# Altium PCB PCB1.PcbDoc
Units mil, origin at the board's own origin, x right, y up, seen from the top; angles counter-clockwise.
Board outline 2435 x 3030 mil, 2 copper layers (Top Layer, Bottom Layer); 22 components, 13 nets, 90 pads, 0 vias.
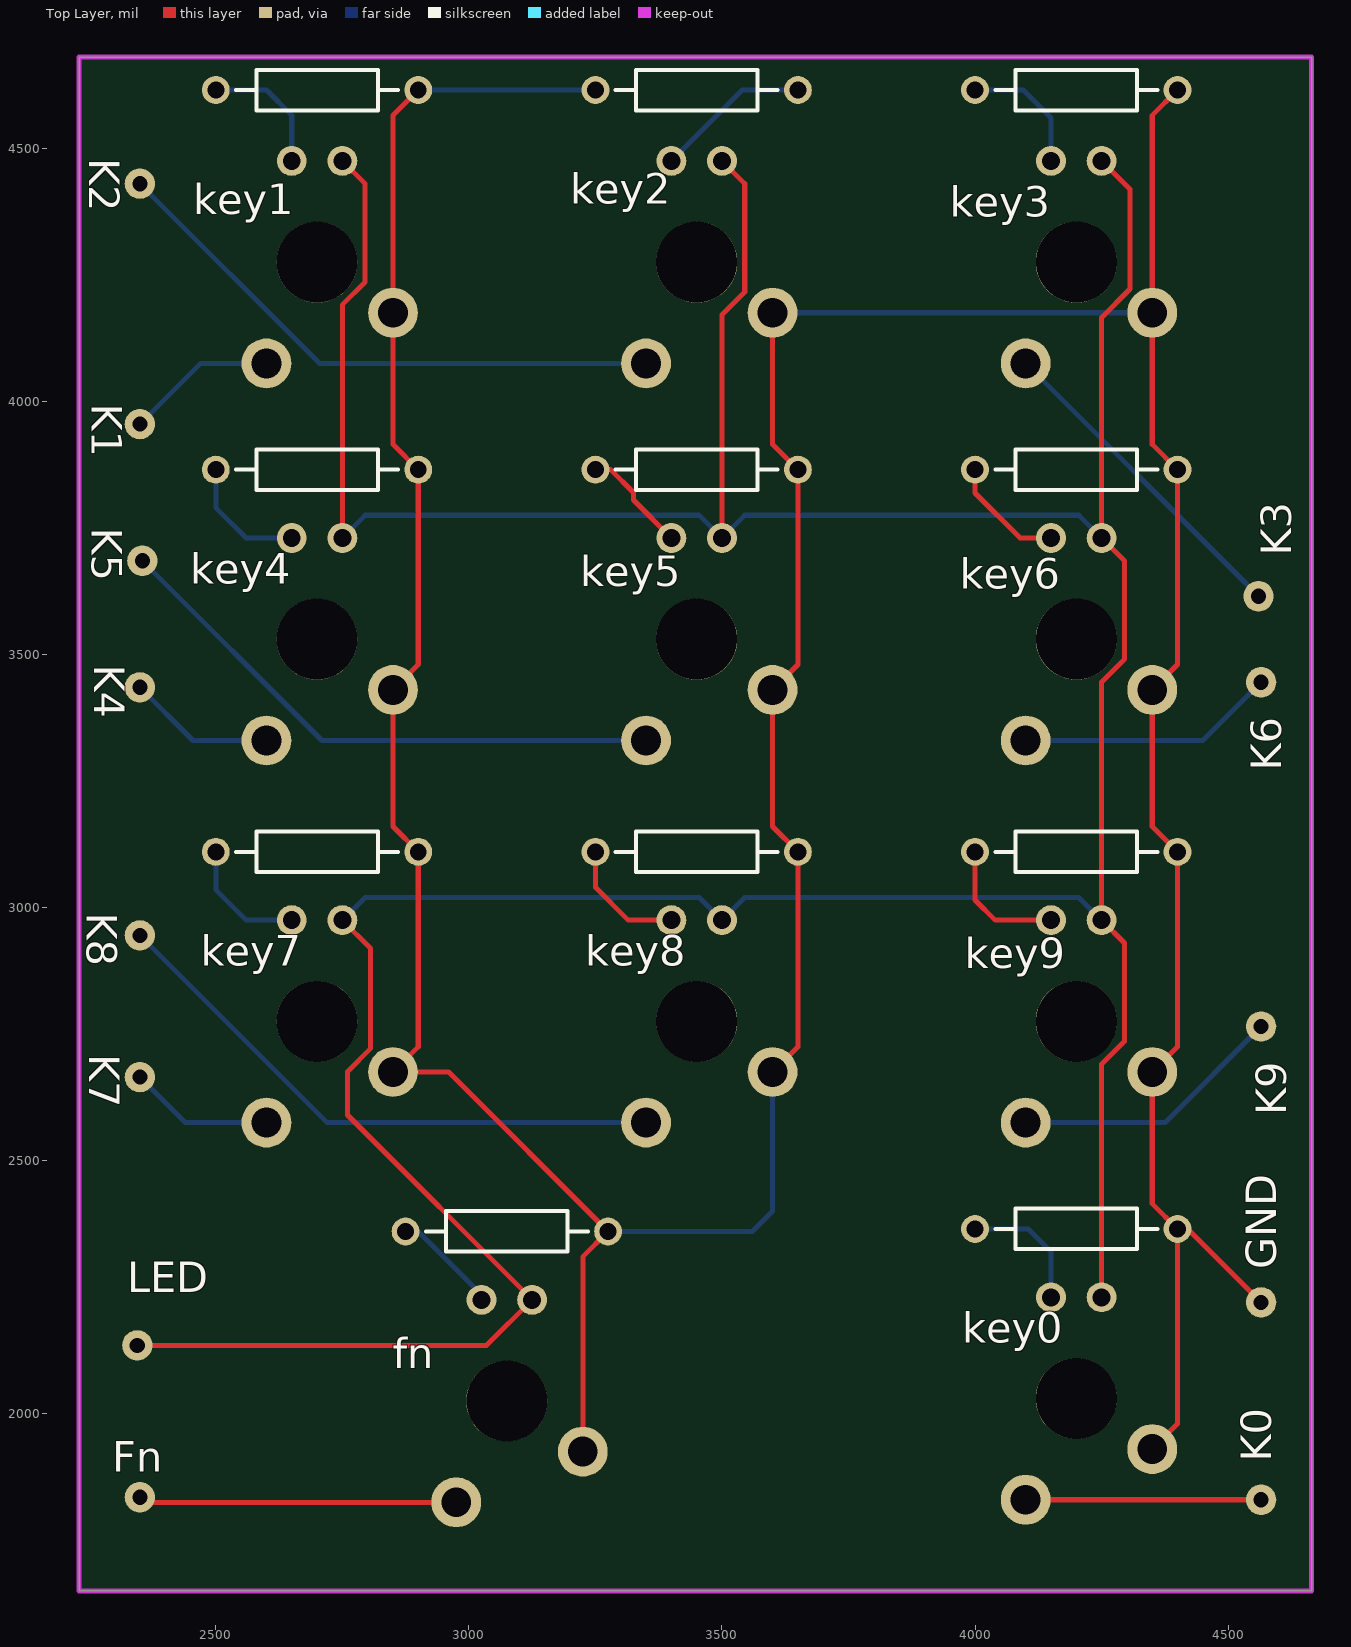
[diagram p0: Top Layer view]
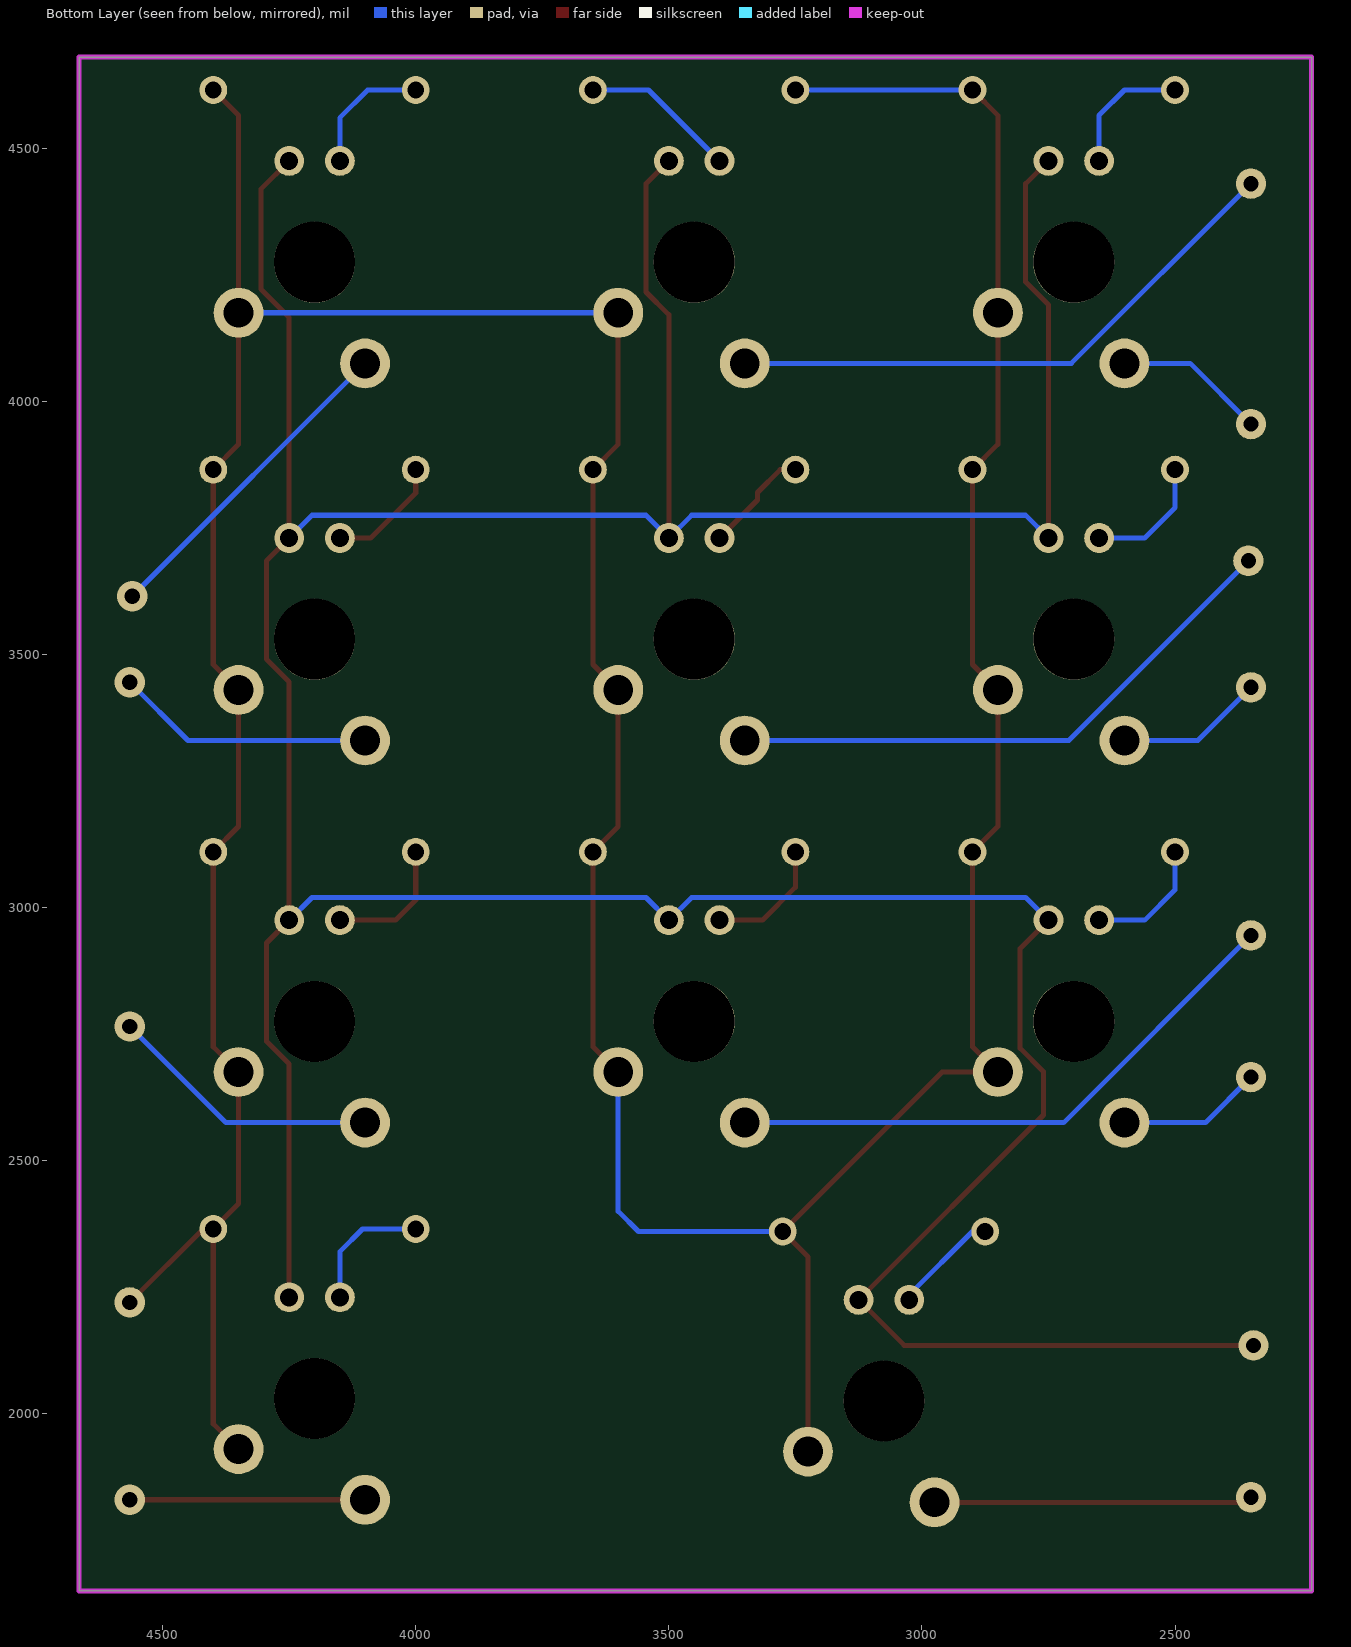
[diagram p1: Bottom Layer view, seen from below]

## Layer stack, top to bottom
Top Solder: solder mask 0.4, Solder Resist, Dk 3.5
Top Layer: signal copper 1.4
Dielectric 1: dielectric 12.6, FR-4, Dk 4.8
Bottom Layer: signal copper 1.4
Bottom Solder: solder mask 0.4, Solder Resist, Dk 3.5

## Board outline
2230,1650 4665,1650 4665,4680 2230,4680

## Design rules (kind name [scope] priority, off if disabled: settings)
Clearance [All] p1: gap=10
PolygonConnect [All] p1: connectstyle=Relief reliefconductorwidth=10 reliefentries=4 polygonreliefangle="90 Angle" airgapwidth=10
RoutingVias [All] p1: holewidth=28 width=50 viastyle="Through Hole" minholewidth=28 minwidth=50 maxholewidth=28 maxwidth=50
SolderMaskExpansion [All] p1: expansion=4
Width [All] p1: maxlimit=10 minlimit=10 preferedwidth=10
30 further rules are at their usual default settings.

## Classes and differential pairs
component class way2: fn key1 key2 key3 key4 key5 key6 key7 key8 key9

## Components (designator, comment, footprint, x,y, rotation, side; value= is the part's Value field where it differs from the comment)
fn "MX_SW" MX_SW-2 3075,2025 r0 top
key0 "MX_SW" MX_SW-2 4200,2030 r0 top (schematic designator key10)
key1 "MX_SW" MX_SW-2 2700,4275 r0 top
key2 "MX_SW" MX_SW-2 3450,4275 r0 top
key3 "MX_SW" MX_SW-2 4200,4275 r0 top
key4 "MX_SW" MX_SW-2 2700,3530 r0 top
key5 "MX_SW" MX_SW-2 3450,3530 r0 top
key6 "MX_SW" MX_SW-2 4200,3530 r0 top
key7 "MX_SW" MX_SW-2 2700,2775 r0 top
key8 "MX_SW" MX_SW-2 3450,2775 r0 top
key9 "MX_SW" MX_SW-2 4200,2775 r0 top
R1 "Res2" AXIAL-0.4 2700,4615 r0 top
R2 "Res2" AXIAL-0.4 3450,4615 r180 top
R3 "Res2" AXIAL-0.4 4200,4615 r180 top
R4 "Res2" AXIAL-0.4 2700,3865 r180 top
R5 "Res2" AXIAL-0.4 3450,3865 r180 top
R6 "Res2" AXIAL-0.4 4200,3865 r180 top
R7 "Res2" AXIAL-0.4 2700,3110 r180 top
R8 "Res2" AXIAL-0.4 3450,3110 r180 top
R9 "Res2" AXIAL-0.4 4200,3110 r180 top
R10 "Res2" AXIAL-0.4 3075,2360 r180 top
R11 "Res2" AXIAL-0.4 4200,2365 r180 top

## Footprints (in the part's own frame and the unit in brackets; to place one, negate y for a bottom-side part, rotate by r counter-clockwise, add the part's x,y. Pads: shape width x height; smd on the part's side, far side on the other; paste and mask are expansions set on the pad)
AXIAL-0.4 [mm] "Axial Device, Thru-Hole; 2 Leads; 0.4 in Pin Spacing"
  round 1.4 hole 0.85: 1(-5.08,0) 2(5.08,0)
  silkscreen extent -4.06,-1.02 4.06,1.02
MX_SW-2 [mm] "without Fixation pins  1-Pole w/LED"
  round 2.5 hole 1.5: 1(3.81,-2.54) 2(-2.54,-5.08)
  round 1.5 hole 0.9: 3(1.27,5.08) 4(-1.27,5.08)
  round 4.064 hole 4.064: ""(0,0)

## Part data
fn key0 key1 key2 key3 key4 key5 key6 key7 key8 key9: library part MX_SW-2, "without Fixation pins  1-Pole w/LED"
R1 R2 R3 R4 R5 R6 R7 R8 R9 R10 R11: "Resistor"

## Free pads (board coordinates)
  round 60 hole 30: 32(2350,1835) 39(2350,2665) 40(2350,2945) 41(2350,3435) 42(2355,3685) 43(2350,3955) 44(2350,4430) 45(4565,2765) 46(4565,3445) 47(4560,3615) 48(4565,1830) 49(4565,2220) 50(2345,2135)

## Nets (pads, with @x,y where several pads share a name; then routed paths per layer and width w, separated by ;. In a path a pad name is that pad's centre, name@x,y a point inside that pad or via, vN(x,y) a via of type N, cw(c..) or ccw(c..) an arc to the next point about the centre after c; other vN are vias at no path point)
13~: fn.3 key0.3 key1.3 key2.3 key3.3 key4.3 key5.3 key6.3 key7.3 key8.3 key9.3 pad.50 | length 8840.3
  Top Layer w10: pad.50 3035,2135 fn.3 2760,2590 2760,2675.81 2806,2721.81 2806,2919 key7.3 ; key4.3 2750,4190.65 2795,4235.65 2795,4430 key1.3 ; key5.3 3500,4171 3545,4216 3545,4430 key2.3 ; key0.3 4250,2690.65 4295,2735.65 4295,2930 key9.3 4250,3445.65 4295,3490.65 4295,3685 key6.3 4250,4165.81 4306,4221.81 4306,4419 key3.3
  Bottom Layer w10: key7.3 2795,3020 3455,3020 key8.3 3545,3020 4205,3020 key9.3 ; key4.3 2795,3775 3455,3775 key5.3 3545,3775 4205,3775 key6.3
GND: fn.1 key0.1 key1.1 key2.1 key3.1 key4.1 key5.1 key6.1 key7.1 key8.1 key9.1 pad.49 R1.2 R2.2 R3.1 R4.1 R5.1 R6.1 R7.1 R8.1 R9.1 R10.1 R11.1 | length 9409.2
  Top Layer w10: R1.2 2850,4565 key1.1 2850,3915 R4.1 2900,3480 key4.1 2850,3160 R7.1 2900,2725 key7.1 2960,2675 R10.1 3225,2310 fn.1 ; key8.1 3650,2725 R8.1 3600,3160 key5.1 3650,3480 R5.1 3600,3915 key2.1 ; key0.1 4400,1980 R11.1 ; R3.1 4350,4565 key3.1 4350,3915 R6.1 4400,3480 key6.1 4350,3160 R9.1 4400,2725 key9.1 4350,2415 R11.1 ; pad.49 4420,2365 R11.1
  Bottom Layer w10: R1.2 R2.2 ; R10.1 3560,2360 3600,2400 key8.1 ; key2.1 key3.1
Netfn_4: fn.4 R10.2 | length 233
  Top Layer w10: R10.2@2860,2345 R10.2
  Bottom Layer w10: R10.2 2900,2360 3025,2235 fn.4
Netkey1_4: key1.4 R1.1 | length 260.7
  Bottom Layer w10: R1.1 2600,4615 2650,4565 key1.4
Netkey2_4: key2.4 R2.1 | length 308
  Bottom Layer w10: key2.4 3540,4615 R2.1
Netkey3_4: key3.4 R3.2 | length 257.8
  Bottom Layer w10: R3.2 4095,4615 4150,4560 key3.4
Netkey4_4: key4.4 R4.2 | length 249.9
  Bottom Layer w10: R4.2 2500,3790 2560,3730 key4.4
Netkey5_4: key5.4 R5.2 | length 214.7
  Top Layer w10: R5.2 3280,3865 3325,3820 3325,3805 key5.4
Netkey6_4: key6.4 R6.2 | length 232.9
  Top Layer w10: R6.2 4000,3819 4089,3730 key6.4
Netkey7_4: key7.4 R7.2 | length 249.9
  Bottom Layer w10: R7.2 2500,3035 2560,2975 key7.4
Netkey8_4: key8.4 R8.2 | length 246.9
  Top Layer w10: R8.2 3250,3040 3315,2975 key8.4
Netkey9_4: key9.4 R9.2 | length 261.6
  Top Layer w10: R9.2 4000,3015 4040,2975 key9.4
Netkey10_4: key0.4 R11.2 | length 258.6
  Bottom Layer w10: R11.2 4105,2365 4150,2320 key0.4
pads on no net: fn. fn.2 key0. key0.2 key1. key1.2 key2. key2.2 key3. key3.2 key4. key4.2 key5. key5.2 key6. key6.2 key7. key7.2 key8. key8.2 key9. key9.2
copper on no net: | length 7126.8
  Top Layer w10: 2350,1825 2975,1825 ; 4100,1830 4565,1830
  Bottom Layer w10: 2350,2665 2440,2575 2600,2575 ; 2350,2945 2720,2575 3350,2575 ; 2350,3435 2455,3330 2600,3330 ; 2350,3690 2710,3330 3350,3330 ; 2350,3955 2470,4075 2600,4075 ; 2350,4430 2705,4075 3350,4075 ; 4100,2575 4375,2575 4565,2765 ; 4100,3330 4450,3330 4565,3445 ; 4100,4075 4540,3635 4560,3615

## Keep-outs
Keep-Out Layer:
  the board outline again, w10

## Silkscreen, mask and mechanical layers (free items; w line width, h text height)
Top Overlay:
  text "K2" at 2250,4480 h60 r270
  text "K1" at 2255,3995 h60 r270
  text "K5" at 2255,3750 h60 r270
  text "K3" at 4625,3695 h60 r90
  text "K4" at 2260,3480 h60 r270
  text "K6" at 4605,3270 h60 r90
  text "K8" at 2245,2990 h60 r270
  text "K7" at 2250,2710 h60 r270
  text "K9" at 4615,2590 h60 r90
  text "GND" at 4595,2285 h60 r90
  text "LED" at 2325,2240 h60
  text "K0" at 4585,1905 h60 r90
  text "Fn" at 2295,1885 h60